# Altium PCB s-radio_PCB.PcbDoc
Units mil, origin at the board's own origin, x right, y up, seen from the top; angles counter-clockwise.
Board outline 1968.5 x 1968.5 mil, 2 copper layers (Top Layer, Bottom Layer), stack 61.811 mil thick; 33 components, 25 nets, 103 pads, 60 vias.
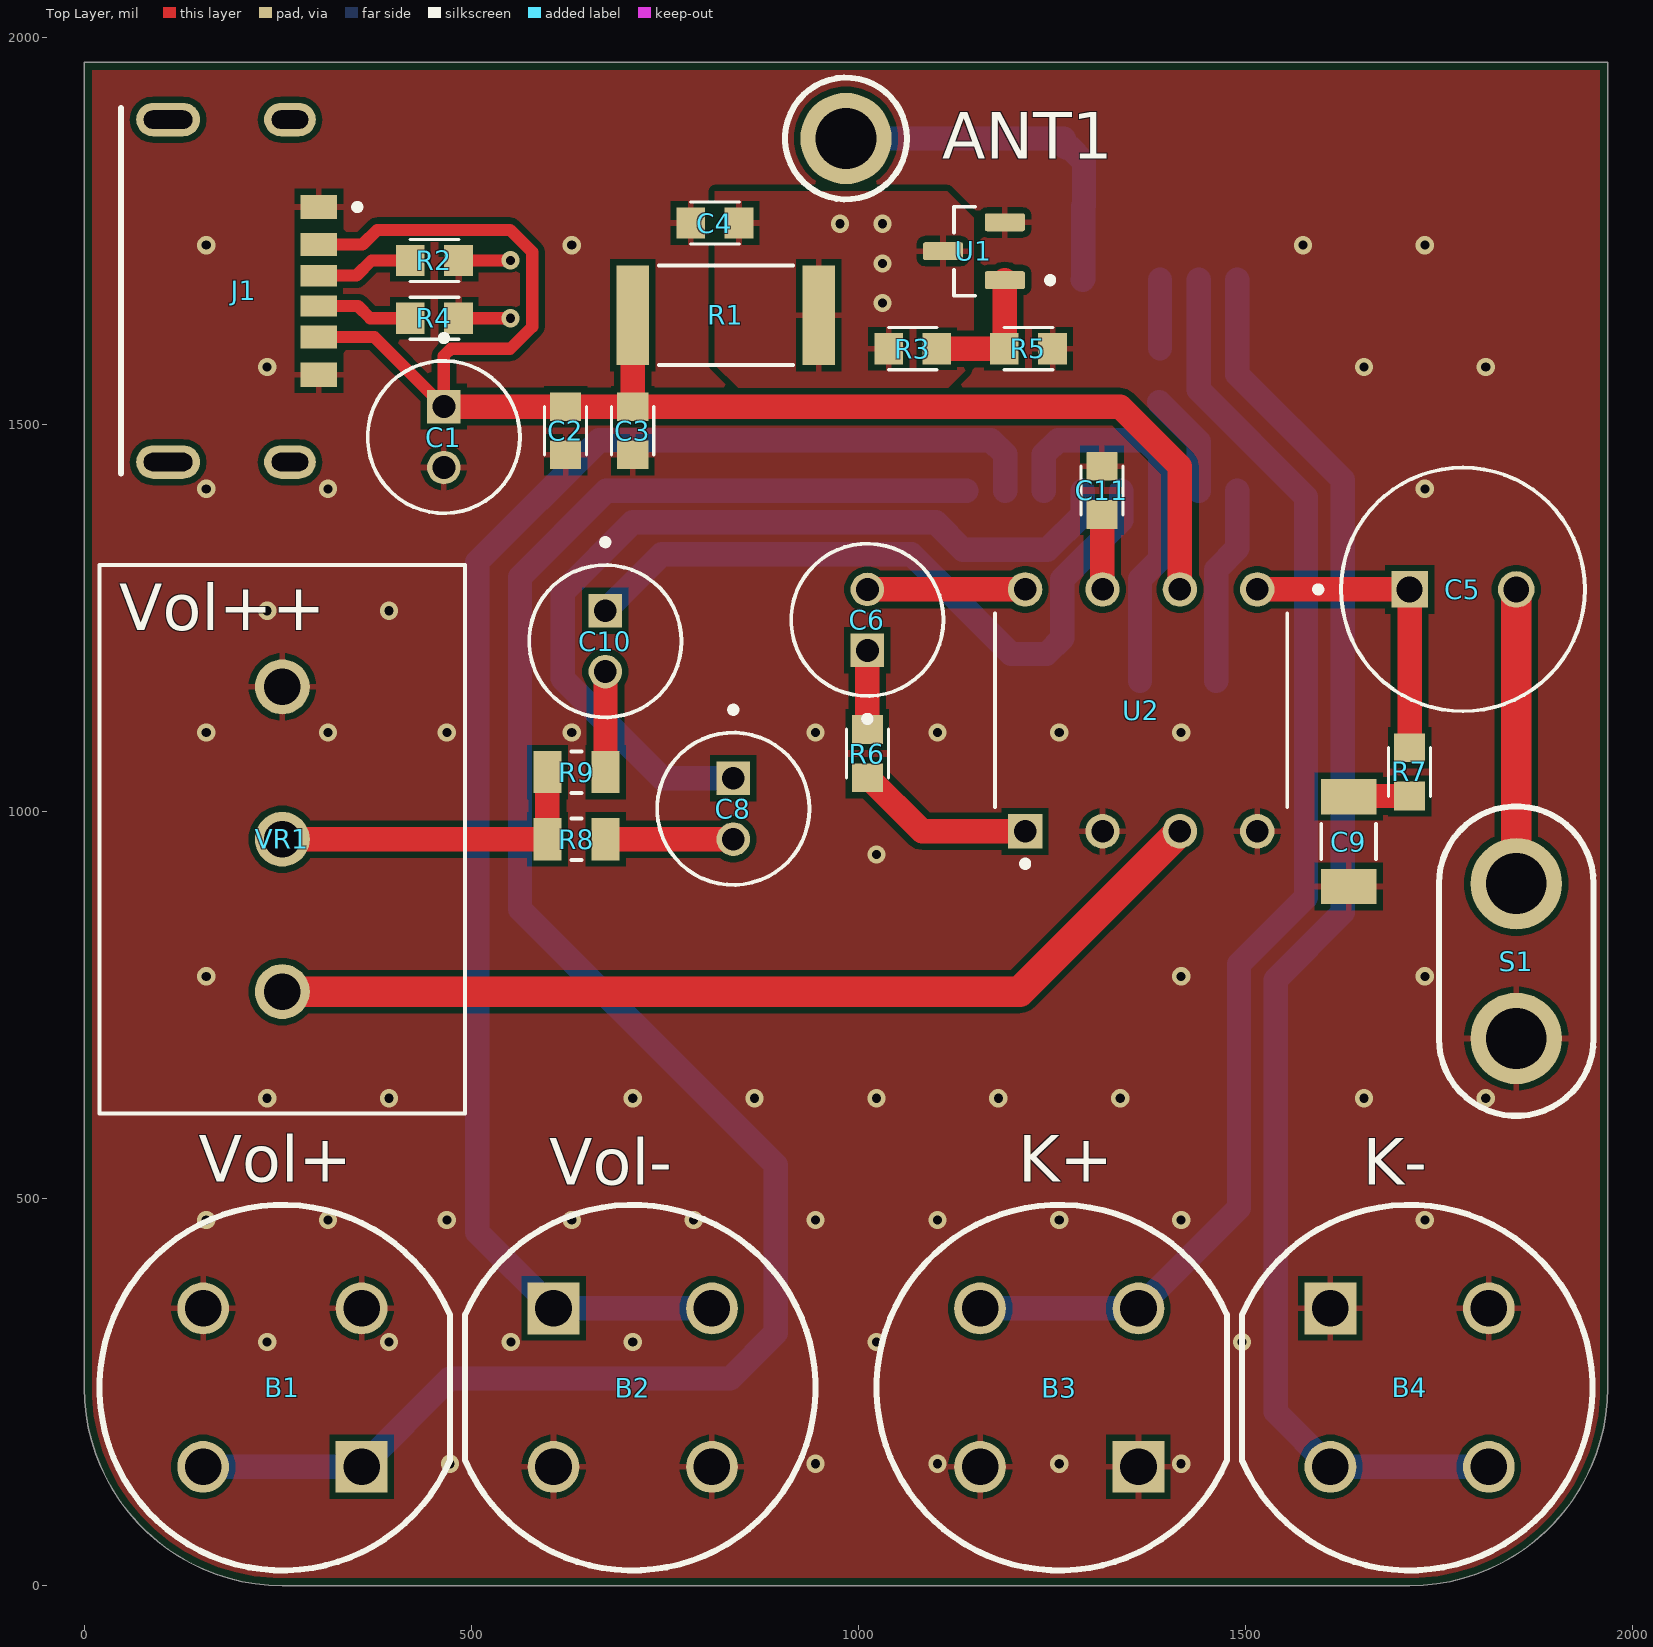
[diagram p0: Top Layer view]
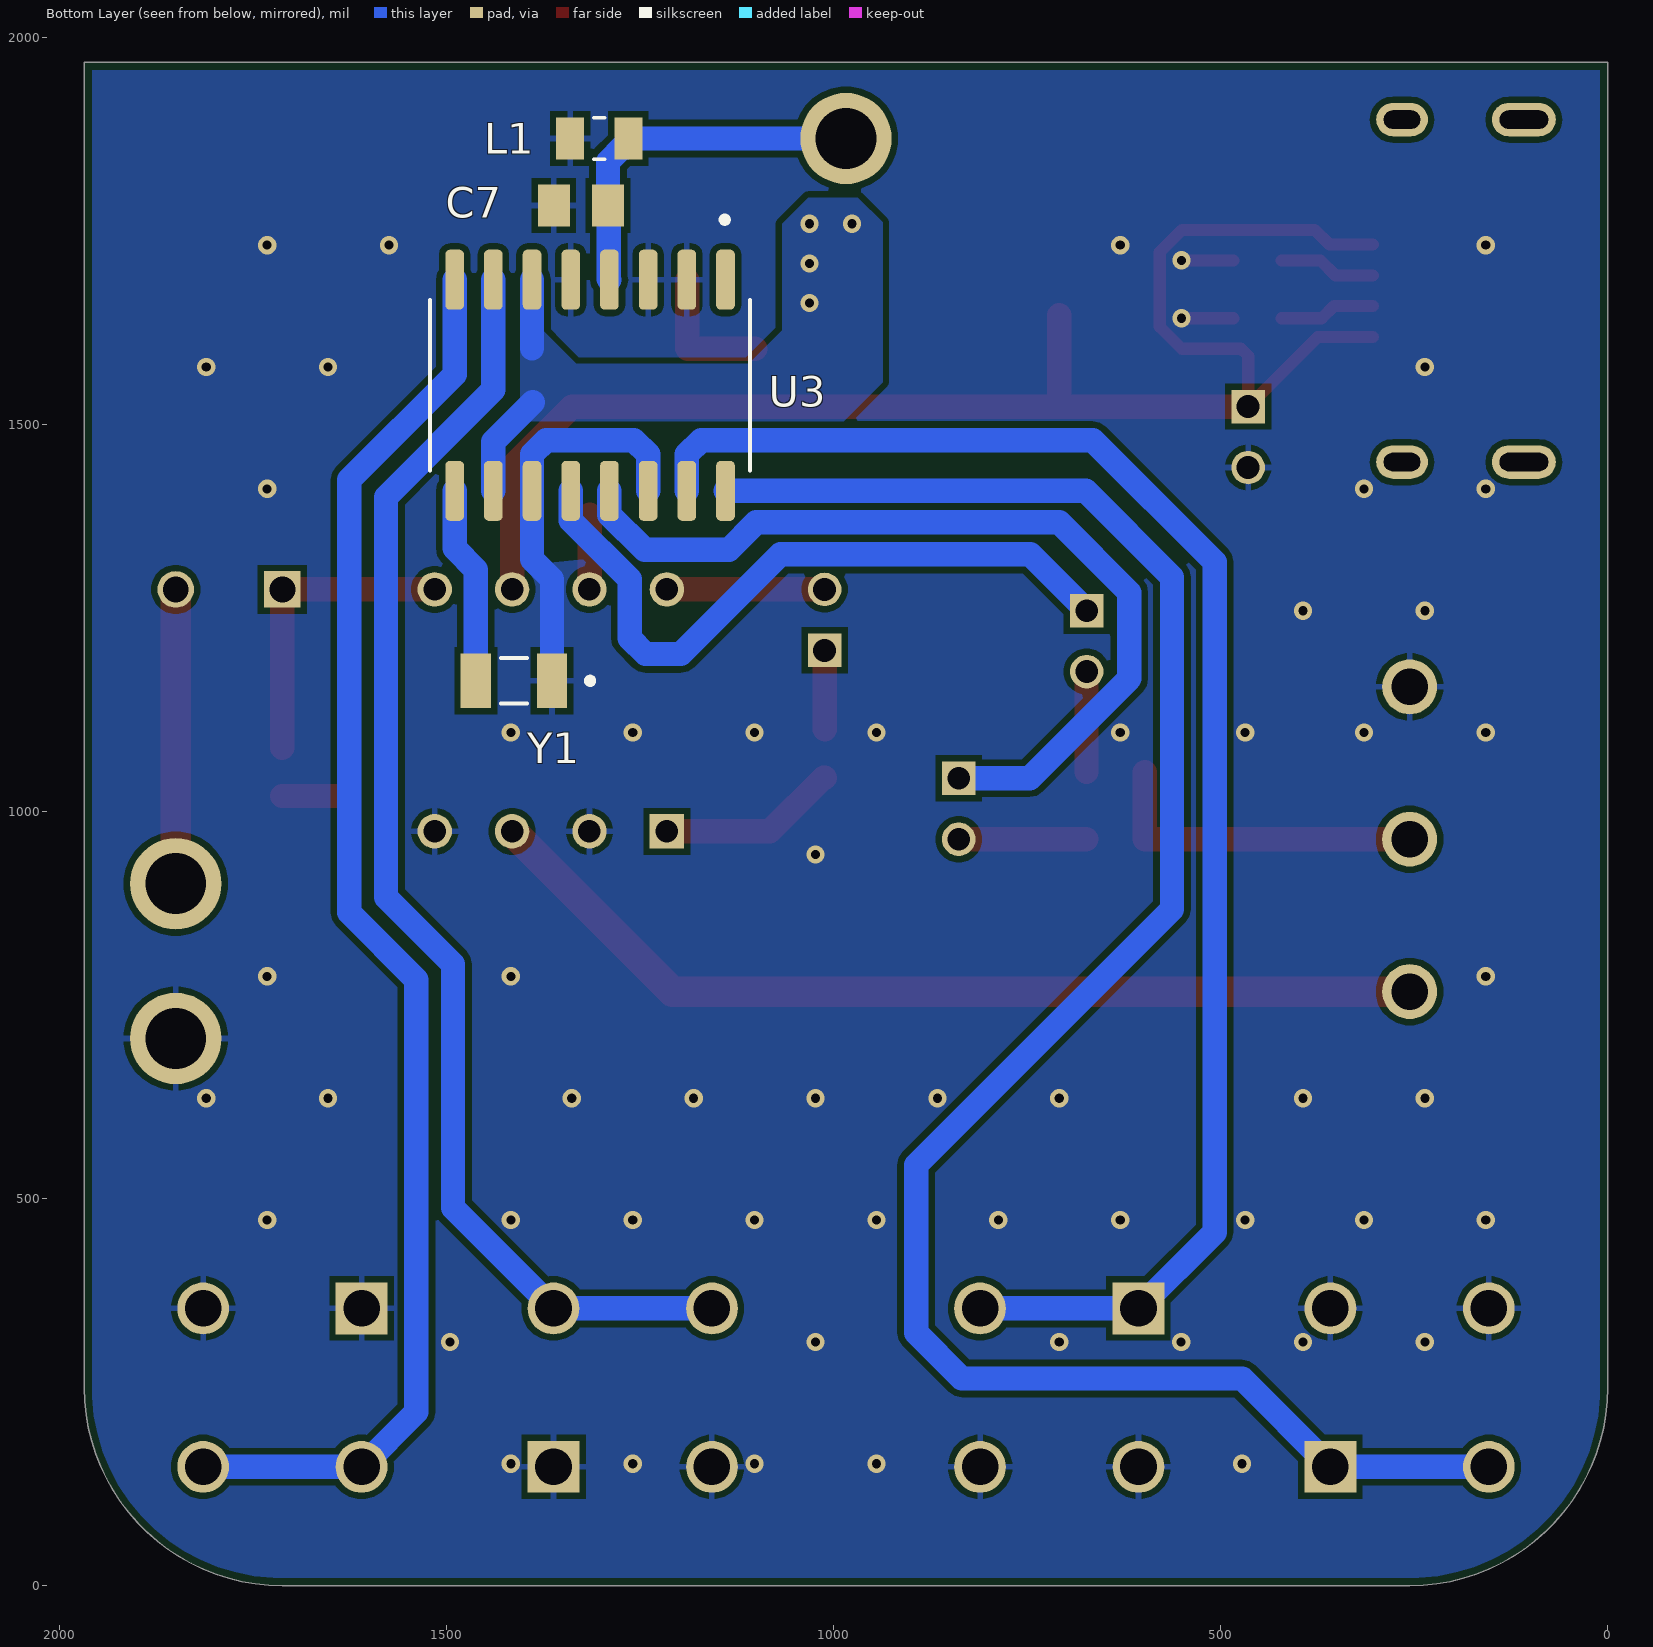
[diagram p1: Bottom Layer view, seen from below]
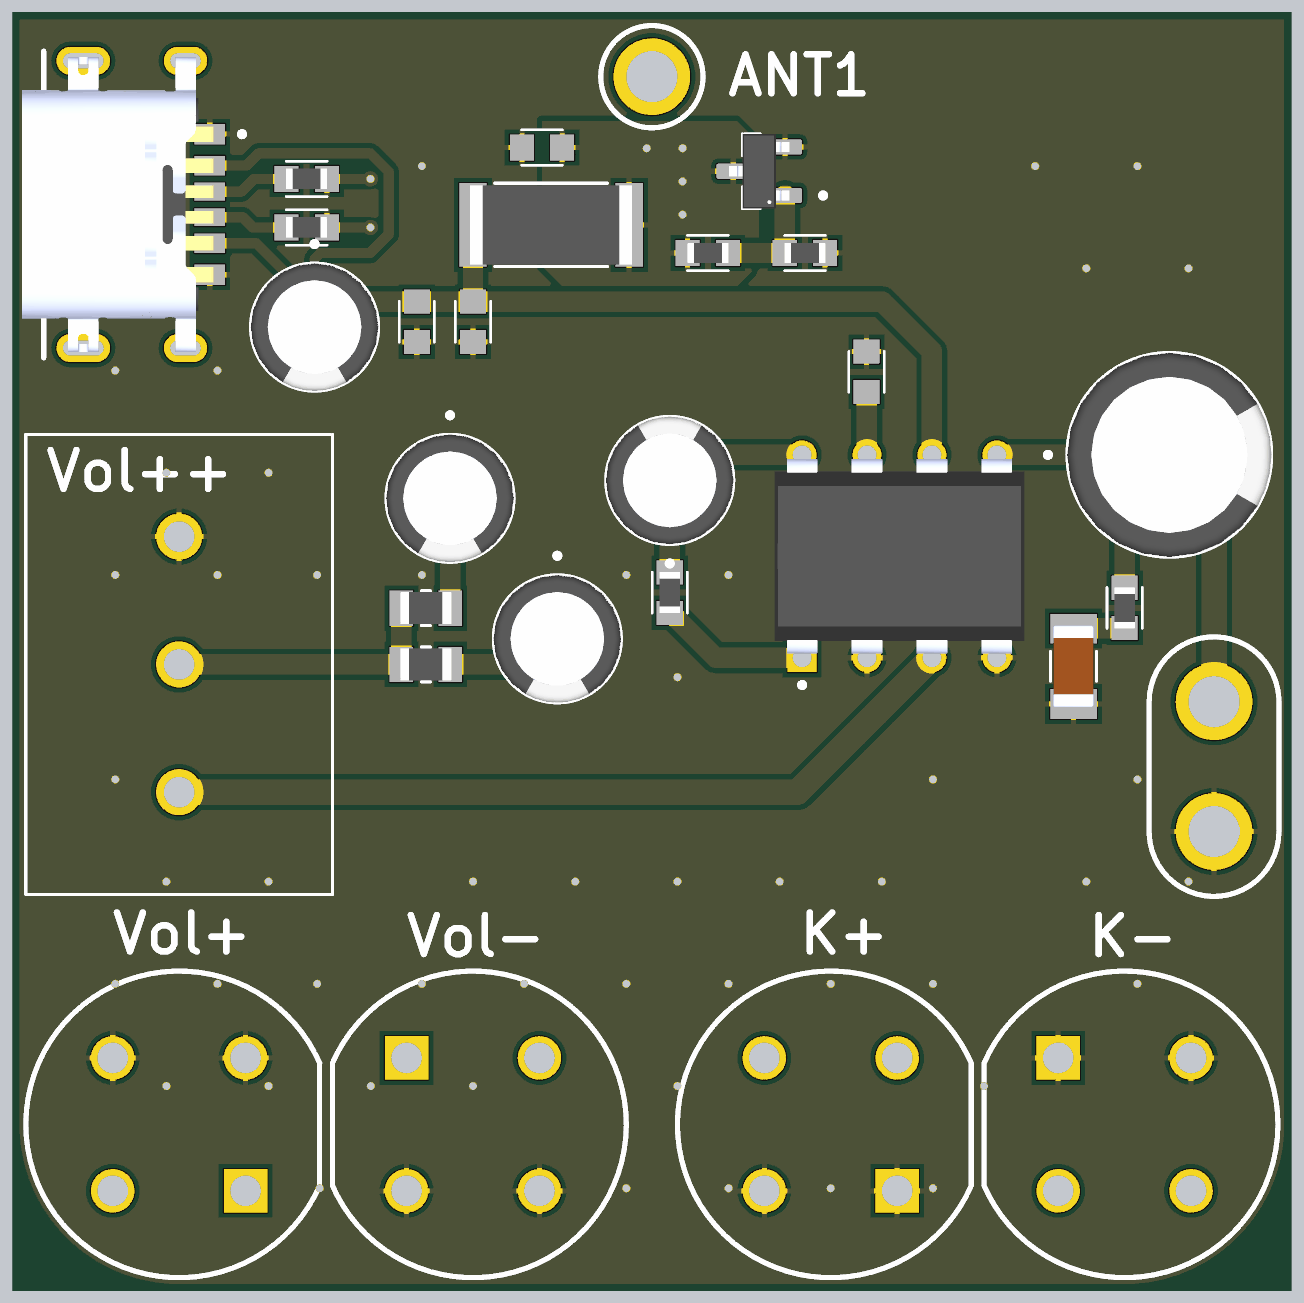
[diagram p2: 3D render of the assembled board from above, using the file's embedded part models]
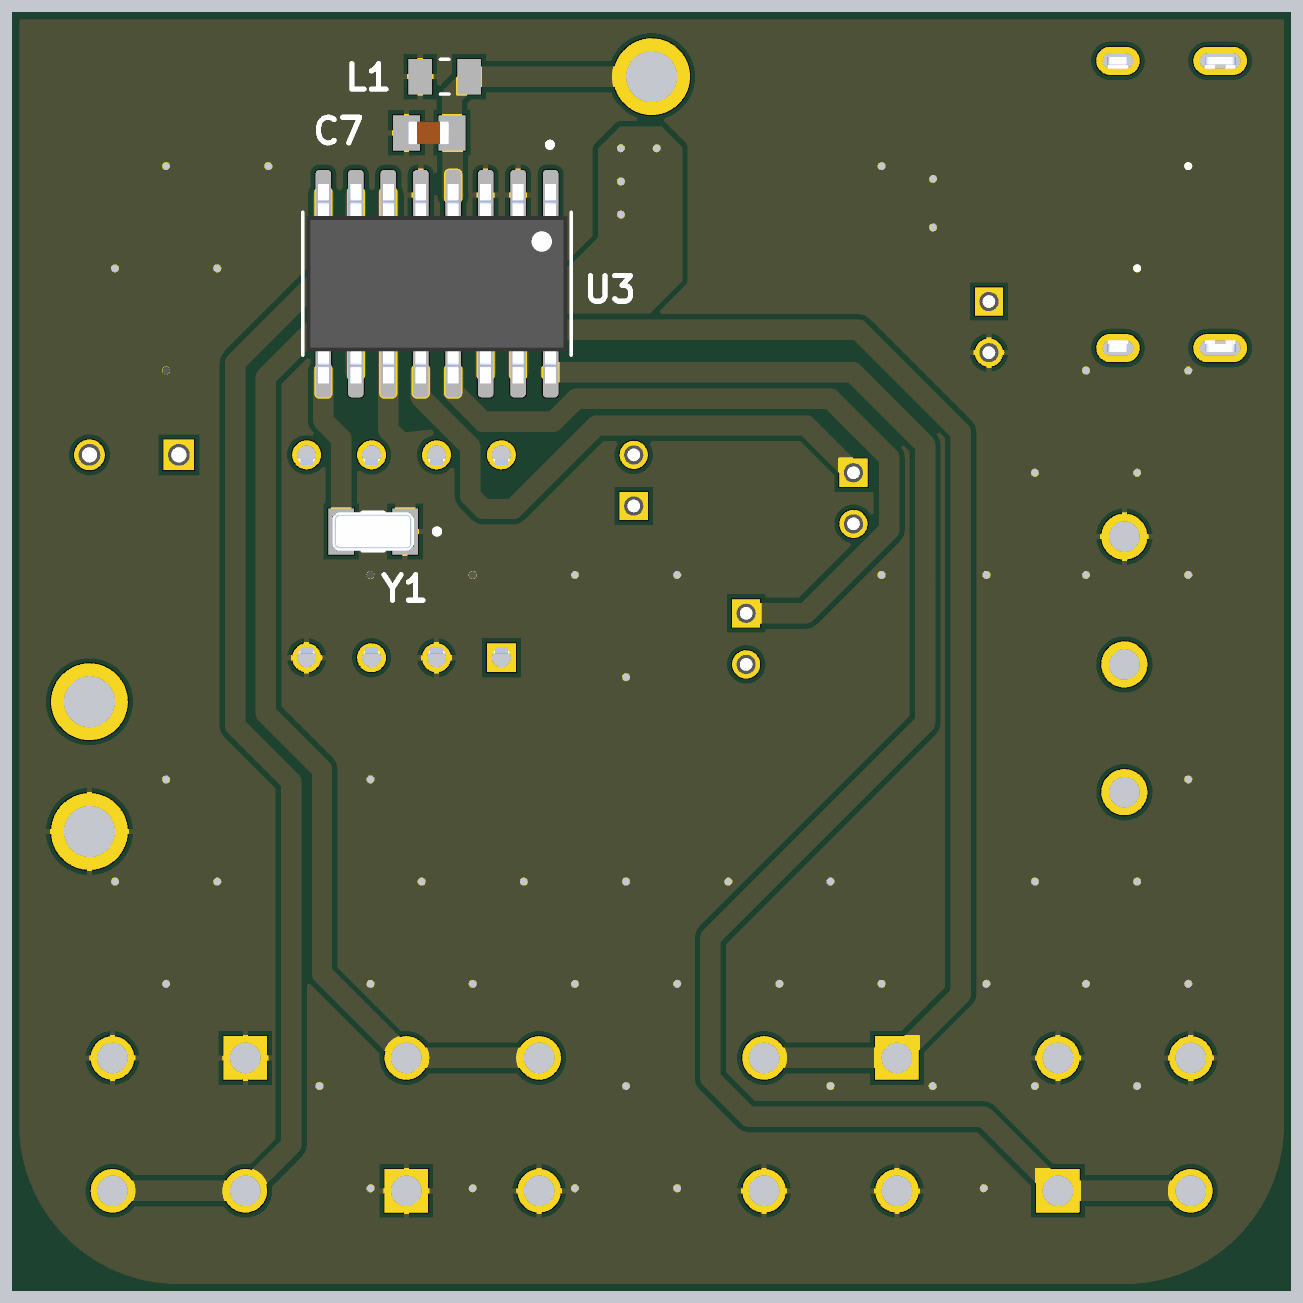
[diagram p3: 3D render of the assembled board from below, using the file's embedded part models]

## Layer stack, top to bottom
Top Solder: solder mask 0.4, Solder Resist, Dk 3.5
Top Layer: signal copper 1.378
Dielectric 1: core 59.0551, FR4 HiTg170, Dk 4.7
Bottom Layer: signal copper 1.378
Bottom Solder: solder mask 0.4, Solder Resist, Dk 3.5

## Board outline
0,1251.97 0,870.08 0,255.91 ccw(c255.91,255.91) 255.91,0 1712.6,0 ccw(c1712.6,255.91) 1968.5,255.91 1968.5,1968.5 0,1968.5

## Design rules (kind name [scope] priority, off if disabled: settings)
AcuteAngle [All] p1: minimum=3.50000000000000E+0001 checktracksonly=FALSE
BoardOutlineClearance "BoardOutlineClearance 1" [All] p1: gap=9.84 ignorepadtopadclearanceinfootprint=FALSE except(0: Arc-SplitContinuation Track-SplitContinuation SMDPad-SplitContinuation THPad-SplitContinuation Via-SplitContinuation Fill-SplitContinuation Poly-SplitContinuation Region-SplitContinuation Text-SplitContinuation) // Milling
BoardOutlineClearance "BoardOutlineClearance 2" [All] p2 off: gap=15.75 ignorepadtopadclearanceinfootprint=FALSE except(0: Arc-SplitContinuation Track-SplitContinuation SMDPad-SplitContinuation THPad-SplitContinuation Via-SplitContinuation Fill-SplitContinuation Poly-SplitContinuation Region-SplitContinuation Text-SplitContinuation) // V-Cut
Clearance "Clearance 3 Oz" [All] p1 off: gap=13.78 ignorepadtopadclearanceinfootprint=FALSE except(9.84: Arc-Hole Track-Hole SMDPad-Hole THPad-Hole Via-Hole Fill-Hole Poly-Hole Region-Hole Text-Hole)
Clearance "Clearance 2 Oz" [All] p2 off: gap=11.81 ignorepadtopadclearanceinfootprint=FALSE except(9.84: Arc-Hole Track-Hole SMDPad-Hole THPad-Hole Via-Hole Fill-Hole Poly-Hole Region-Hole Text-Hole)
Clearance "Clearance-1 1 Oz" [All] p3: gap=7.87 ignorepadtopadclearanceinfootprint=FALSE except(9.84: Arc-Hole Track-Hole SMDPad-Hole THPad-Hole Via-Hole Fill-Hole Poly-Hole Region-Hole Text-Hole) // Standart
Clearance "Clearance-2 1 Oz" [All] p4 off: gap=5.91 ignorepadtopadclearanceinfootprint=FALSE except(7.87: Arc-Fill Arc-Poly Track-Fill Track-Poly SMDPad-Fill SMDPad-Poly THPad-Fill THPad-Poly Via-Fill Via-Poly Fill-Fill Fill-Poly Poly-Poly; 9.84: Arc-Hole Track-Hole SMDPad-Hole THPad-Hole Via-Hole Fill-Hole Poly-Hole Region-Hole Text-Hole) // Advance
Clearance "Clearance-1 1/2 Oz" [All] p5 off: gap=4.92 ignorepadtopadclearanceinfootprint=FALSE except(7.87: Arc-Fill Arc-Poly Track-Fill Track-Poly SMDPad-SMDPad SMDPad-Fill SMDPad-Poly THPad-Fill THPad-Poly Via-Fill Via-Poly Fill-Fill Fill-Poly Poly-Poly Poly-Region Poly-Text; 9.84: Arc-Hole Track-Hole SMDPad-Hole THPad-Hole Via-Hole Fill-Hole Poly-Hole Region-Hole Text-Hole) // Standart
Clearance "Clearance-2 1/2 Oz" [All] p6 off: gap=3.94 ignorepadtopadclearanceinfootprint=FALSE except(5.91: Arc-Fill Arc-Poly Track-Fill Track-Poly SMDPad-SMDPad SMDPad-Fill SMDPad-Poly THPad-Fill THPad-Poly Via-Fill Via-Poly Fill-Fill Fill-Poly Poly-Poly Poly-Region Poly-Text; 9.84: Arc-Hole Track-Hole SMDPad-Hole THPad-Hole Via-Hole Fill-Hole Poly-Hole Region-Hole Text-Hole) // Advance
DiffPairsRouting "DiffPairsRouting 1 Oz" [All] p1: maxlimit=10 minlimit=7.87 mostfreqgap=10 toplayer_minwidth=7.87 toplayer_maxwidth=15 toplayer_prefwidth=15 bottomlayer_minwidth=7.87 bottomlayer_maxwidth=15 bottomlayer_prefwidth=15 maxuncoupledlength=500
DiffPairsRouting "DiffPairsRouting 1/2 Oz" [All] p2 off: maxlimit=10 minlimit=3.94 mostfreqgap=10 toplayer_minwidth=3.94 toplayer_maxwidth=15 toplayer_prefwidth=15 bottomlayer_minwidth=3.94 bottomlayer_maxwidth=15 bottomlayer_prefwidth=15 maxuncoupledlength=500
HoleSize "Minimum HoleSize" [IsPad] p1: absolutevalues=TRUE maxlimit=232.28 minlimit=23.62 maxpercent=80.000 minpercent=20.000
HoleSize "Minimum HoleSize VIA 1" [IsVia] p2: absolutevalues=TRUE maxlimit=232.28 minlimit=11.81 maxpercent=80.000 minpercent=20.000 // Standart
HoleSize "Minimum HoleSize VIA 2" [IsVia] p3 off: absolutevalues=TRUE maxlimit=232.28 minlimit=7.87 maxpercent=80.000 minpercent=20.000 // Advance
HoleToHoleClearance Hole2HoleClearance [All] p1: gap=9.84 allowstackedmicrovias=FALSE
MinimumAnnularRing "Minimum AR VIA Standart" [IsVia] p1: minimumring=5.91
MinimumAnnularRing "Minimum AR PAD Standart" [IsPAD] p2: minimumring=7.87
MinimumAnnularRing "Minimum AR VIA Advance" [IsVia] p3 off: minimumring=3.94
MinimumAnnularRing "Minimum AR PAD Advance" [IsPAD] p4 off: minimumring=5.91
MinimumSolderMaskSliver "SolderMask Bridge Standart" [All] p1: minsoldermaskwidth=5.91 // All Masks
MinimumSolderMaskSliver "SolderMask Bridge Advance" [All] p2: minsoldermaskwidth=3.94 // Mask LDI
PlaneClearance "PlaneClearance 3 Oz" [All] p1 off: clearance=13.78
PlaneClearance "PlaneClearance 2 Oz" [All] p2 off: clearance=11.81
PlaneClearance "PlaneClearance 1 Oz" [All] p3: clearance=7.87
PlaneClearance "PlaneClearance-1 1/2 Oz" [All] p4 off: clearance=7.87 // Standart
PlaneClearance "PlaneClearance-2 1/2 Oz" [All] p5 off: clearance=5.91 // Advance
PlaneConnect "TermalConnect 3 Oz" [All] p1 off: planeconnectstyle=Relief reliefexpansion=7.87 reliefentries=4 reliefconductorwidth=13.78 reliefairgap=13.78 // Standart
PlaneConnect "TermalConnect 2 Oz" [All] p2 off: planeconnectstyle=Relief reliefexpansion=7.87 reliefentries=4 reliefconductorwidth=11.81 reliefairgap=11.81 // Standart
PlaneConnect "TermalConnect-1 1 Oz" [All] p3: planeconnectstyle=Relief reliefexpansion=7.87 reliefentries=4 reliefconductorwidth=7.87 reliefairgap=7.87 // Standart
PlaneConnect "TermalConnect-2 1 Oz" [All] p4 off: pad.planeconnectstyle=Relief pad.reliefexpansion=5.91 pad.reliefentries=4 pad.reliefconductorwidth=7.87 pad.reliefairgap=7.87 via.planeconnectstyle=Direct via.reliefexpansion=5.91 via.reliefentries=4 via.reliefconductorwidth=5.91 via.reliefairgap=5.91 // Advance
PlaneConnect "TermalConnect-1 1/2 Oz" [All] p5 off: planeconnectstyle=Relief reliefexpansion=7.87 reliefentries=4 reliefconductorwidth=7.87 reliefairgap=7.87 // Standart
PlaneConnect "TermalConnect-2 1/2 Oz" [All] p6 off: pad.planeconnectstyle=Relief pad.reliefexpansion=5.91 pad.reliefentries=4 pad.reliefconductorwidth=5.91 pad.reliefairgap=5.91 via.planeconnectstyle=Direct via.reliefexpansion=5.91 via.reliefentries=4 via.reliefconductorwidth=5.91 via.reliefairgap=5.91 // Advance
PolygonConnect "PolygonConnect 3 Oz" [All] p1 off: thpad.connectstyle=Relief thpad.reliefconductorwidth=13.78 thpad.reliefentries=4 thpad.polygonreliefangle="90 Angle" thpad.airgapwidth=13.78 smdpad.connectstyle=Relief smdpad.reliefconductorwidth=13.78 smdpad.reliefentries=4 smdpad.polygonreliefangle="90 Angle" smdpad.airgapwidth=13.78 via.connectstyle=Direct via.reliefconductorwidth=10 via.reliefentries=4 via.polygonreliefangle="90 Angle" via.airgapwidth=10
PolygonConnect "PolygonConnect 2 Oz" [All] p2 off: thpad.connectstyle=Relief thpad.reliefconductorwidth=11.81 thpad.reliefentries=4 thpad.polygonreliefangle="90 Angle" thpad.airgapwidth=11.81 smdpad.connectstyle=Relief smdpad.reliefconductorwidth=11.81 smdpad.reliefentries=4 smdpad.polygonreliefangle="90 Angle" smdpad.airgapwidth=11.81 via.connectstyle=Direct via.reliefconductorwidth=10 via.reliefentries=4 via.polygonreliefangle="90 Angle" via.airgapwidth=10
PolygonConnect "PolygonConnect-1 1 Oz" [All] p3: thpad.connectstyle=Relief thpad.reliefconductorwidth=7.87 thpad.reliefentries=4 thpad.polygonreliefangle="90 Angle" thpad.airgapwidth=7.87 smdpad.connectstyle=Relief smdpad.reliefconductorwidth=7.87 smdpad.reliefentries=4 smdpad.polygonreliefangle="90 Angle" smdpad.airgapwidth=7.87 via.connectstyle=Direct via.reliefconductorwidth=10 via.reliefentries=4 via.polygonreliefangle="90 Angle" via.airgapwidth=10 // Standart
PolygonConnect "PolygonConnect-2 1 Oz" [All] p4 off: thpad.connectstyle=Relief thpad.reliefconductorwidth=5.91 thpad.reliefentries=4 thpad.polygonreliefangle="90 Angle" thpad.airgapwidth=5.91 smdpad.connectstyle=Relief smdpad.reliefconductorwidth=5.91 smdpad.reliefentries=4 smdpad.polygonreliefangle="90 Angle" smdpad.airgapwidth=5.91 via.connectstyle=Direct via.reliefconductorwidth=10 via.reliefentries=4 via.polygonreliefangle="90 Angle" via.airgapwidth=10 // Advance
PolygonConnect "PolygonConnect-1 1/2 Oz" [All] p5 off: thpad.connectstyle=Relief thpad.reliefconductorwidth=5.91 thpad.reliefentries=4 thpad.polygonreliefangle="90 Angle" thpad.airgapwidth=7.87 smdpad.connectstyle=Relief smdpad.reliefconductorwidth=7.87 smdpad.reliefentries=4 smdpad.polygonreliefangle="90 Angle" smdpad.airgapwidth=7.87 via.connectstyle=Direct via.reliefconductorwidth=10 via.reliefentries=4 via.polygonreliefangle="90 Angle" via.airgapwidth=10 // Standart
PolygonConnect "PolygonConnect-2 1/2 Oz" [All] p6 off: thpad.connectstyle=Relief thpad.reliefconductorwidth=4.92 thpad.reliefentries=4 thpad.polygonreliefangle="90 Angle" thpad.airgapwidth=5.91 smdpad.connectstyle=Relief smdpad.reliefconductorwidth=4.92 smdpad.reliefentries=4 smdpad.polygonreliefangle="90 Angle" smdpad.airgapwidth=5.91 via.connectstyle=Direct via.reliefconductorwidth=10 via.reliefentries=4 via.polygonreliefangle="90 Angle" via.airgapwidth=10 // Advance
RoutingCorners [All] p1 off: cornerstyle=45-Degree minsetback=100 maxsetback=100
RoutingVias [All] p1: holewidth=11.81 width=23.62 viastyle="Through Hole" minholewidth=7.87 minwidth=15.75 maxholewidth=232.28 maxwidth=251.97
SilkToSilkClearance Silk2SilkClearance [All] p1 off: silktosilkclearance=5.91
SilkToSolderMaskClearance Silk2SolderMaskClearance [IsPad] p1 off: minsilkscreentomaskgap=5.91 clearancetoexposedcopper=TRUE
SolderMaskExpansion SolderMaskExpansion-1 [All] p1: expansion=1.97 istentingtop=FALSE // Standart
SolderMaskExpansion "SolderMaskExpansion LDI" [All] p2: expansion=0.98 istentingtop=FALSE // Advance
UnRoutedNet [All] p1: checkbadconnections=TRUE
Width "Width 3 Oz" [All] p1 off: maxlimit=393.7 minlimit=13.78 preferedwidth=15.75 checkconnectedcopper=TRUE
Width "Width 2 Oz" [All] p2 off: maxlimit=393.7 minlimit=11.81 preferedwidth=13.78 minimp=50.000000 maximp=50.000000 favimp=50.000000 checkconnectedcopper=TRUE
Width "Width 1 Oz" [All] p3: maxlimit=393.7 minlimit=5.91 preferedwidth=7.87 checkconnectedcopper=TRUE
Width "Width 1/2 Oz" [All] p4 off: maxlimit=393.7 minlimit=3.94 preferedwidth=4.92 checkconnectedcopper=TRUE
20 further rules are at their usual default settings.

## Components (designator, comment, footprint, x,y, rotation, side; value= is the part's Value field where it differs from the comment)
ANT1 "Antenna" ANTENNA 984.25,1870.08 r0 top
B1 "TS4-1BN" TS4-1BN 255.91,255.91 r180 top
B2 "TS4-1BN" TS4-1BN 708.66,255.91 r0 top
B3 "TS4-1BN" TS4-1BN 1259.84,255.91 r180 top
B4 "TS4-1BN" TS4-1BN 1712.6,255.91 r0 top
C1 "К50-35" "К50-35 5X7" 464.57,1484.25 r270 top value="10 uF"
C2 "CAP 0603 1 uF" CAP_0603 622.05,1492.52 r90 top value="1 uF"
C3 "CAP 0603 0.1 uF" CAP_0603 708.66,1492.52 r90 top value="0.1 uF"
C4 "CAP 0603 0.1 uF" CAP_0603 814.96,1760.83 r0 top value="0.1 uF"
C5 "CAP 270 uF" CAPPRD350W60D800H1500 1781.5,1287.4 r0 top value="270 uF"
C6 "К50-35" "К50-35 5X7" 1011.81,1248.03 r90 top value="10 uF"
C7 "CAP 0805 24 pF" CAP_0805 1326.77,1783.46 r180 bottom value="24 pF"
C8 "К50-35" "К50-35 5X7" 838.58,1003.94 r270 top value="10 uF"
C9 "CAP 0.05uF 1206" CAP_1206 1633.86,961.61 r90 top value="0.05 uF"
C10 "К50-35" "К50-35 5X7" 673.23,1220.47 r270 top value="10 uF"
C11 "CAP 0603 0.1 uF" CAP_0603 1314.96,1415.35 r90 top value="0.1 uF"
J1 "USB4515-GF-A_REVA" GCT_USB4515-GF-A_REVA 108.27,1673.23 r270 top
L1 "LQW2BASR10J00L" L_0805 1303.15,1870.08 r180 bottom value="100 nH"
R1 "RES 27 Ohm" RES_2512 828.94,1641.73 r0 top value="27 R"
R2 "RES 5.1 kOhm" RES_0603 452.36,1712.6 r0 top value="5.1 kOhm"
R3 "RES 1 kOhm" RES_0603 1070.47,1598.43 r180 top value="1 kOhm"
R4 "RES 5.1 kOhm" RES_0603 452.36,1637.8 r0 top value="5.1 kOhm"
R5 "RES 3 kOhm" RES_0603 1220.08,1598.43 r180 top value="3 kOhm"
R6 "RES 1.2 kOhm" RES_0603 1011.81,1075.2 r270 top value="1.2 kOhm"
R7 "RES 10 R" RES_0603 1712.6,1051.57 r90 top value="10 R"
R8 "RES 4.7 kOhm" RES_0805 636.02,964.57 r180 top value="4.7 k"
R9 "RES 4.7 kOhm" RES_0805 636.02,1051.18 r180 top value="4.7 k"
S1 "SPEAKER" SPEAKER 1850.39,807.09 r270 top
U1 "TL431" SOT95P237X112-3N 1149.61,1724.41 r180 top
U2 "LM386" DIP-8 1365.75,1131.1 r90 top
U3 "RDA5807" SOP-16 1314.96,1551.18 r270 bottom
VR1 "VAR REZ 10 kOhm" P160 255.91,964.57 r270 top value="10 kOhm"
Y1 "NX3215SA-32.768K-STD-MUA-8" XTAL_NX3215SA-32.768K-STD-MUA-8 1413.39,1169.29 r0 bottom value="32768 Hz"

## Footprints (in the part's own frame and the unit in brackets; to place one, negate y for a bottom-side part, rotate by r counter-clockwise, add the part's x,y. Pads: shape width x height; smd on the part's side, far side on the other; paste and mask are expansions set on the pad)
ANTENNA [mm]
  round 3 hole 2: 1(0,0)
  silkscreen extent -2,-2 2,2
CAP_0603 [mm]
  rect 0.94x1.02 smd: 1(-0.79,0) 2(0.79,0)
  silkscreen extent -0.8,-0.69 0.8,0.69
CAP_0805 [mm]
  rect 1.05x1.38 smd: 1(-0.888,0) 2(0.888,0)
  body extent -0.83,-0.45 0.77,0.45, height 0.8
CAP_1206 [mm]
  rect 1.16x1.82 smd: 1(-1.475,0) 2(1.475,0)
  silkscreen extent -0.57,-0.9 0.57,0.9, body extent -1.6,-0.8 1.6,0.8, height 0.94
CAPPRD350W60D800H1500 [mm]
  round 1.2 hole 0.85: N(1.75,0)
  rect 1.2x1.2 hole 0.85: P(-1.75,0)
  silkscreen extent -4.85,-4 4,4, body extent -4,-4 4,4, height 15
DIP-8 [mm]
  rect 1.13x1.13 hole 0.74: 1(-3.97,3.81)
  round 1.13 hole 0.74: 2(-3.97,1.27) 3(-3.97,-1.27) 4(-3.97,-3.81) 5(3.97,-3.81) 6(3.97,-1.27) 7(3.97,1.27) 8(3.97,3.81)
  silkscreen extent -5.13,-4.79 3.18,4.79, body extent -3.81,-4.88 3.81,4.88, height 4.96
GCT_USB4515-GF-A_REVA [mm]
  rect 0.7x1.2 smd: A5(-0.5,4.95) B5(0.5,4.95)
  rect 0.76x1.2 smd: A9(1.52,4.95) B9(-1.52,4.95)
  rect 0.8x1.2 smd: A12(2.75,4.95) B12(-2.75,4.95)
  oval 1.1x2.1 hole 0.6 slot 1.6 at 90 deg: S1(-5.62,0) S2(5.62,0)
  oval 1.1x1.7 hole 0.6 slot 1.2 at 90 deg: S3(-5.62,4) S4(5.62,4)
  silkscreen extent -6,-1.55 6,6.31, body extent -5.77,-2.4 5.77,5.1, height 1.56
L_0805 [mm]
  rect 0.92x1.38 smd: 1(-0.955,0) 2(0.955,0)
  silkscreen extent -0.17,-0.68 0.17,0.68
P160 [mm]
  round 1.8 hole 1.2: 1(-5,0) 2(0,0) 3(5,0)
  silkscreen extent -9,-6 9,6
RES_0603 [mm]
  rect 0.94x1.02 smd: 1(-0.79,0) 2(0.79,0)
  silkscreen extent -0.8,-0.69 0.8,0.69, body extent -0.8,-0.4 0.8,0.4, height 0.55
RES_0805 [mm]
  rect 0.92x1.38 smd: 1(-0.955,0) 2(0.955,0)
  silkscreen extent -0.17,-0.68 0.17,0.68, body extent -1,-0.63 1,0.63, height 0.6
RES_2512 [mm]
  rect 1.07x3.27 smd: 1(-3.055,0) 2(3.055,0)
  silkscreen extent -2.2,-1.63 2.2,1.63, body extent -3.17,-1.55 3.17,1.55, height 0.65
SOP-16 [mm]
  rrect50% 1.97x0.61 smd: 1(-3.465,4.445) 2(-3.465,3.175) 3(-3.465,1.905) 4(-3.465,0.635) 5(-3.465,-0.635) 6(-3.465,-1.906) 7(-3.465,-3.175) 8(-3.465,-4.445) 9(3.465,-4.445) 10(3.465,-3.175) 11(3.465,-1.905) 12(3.465,-0.635) 13(3.465,0.635) 14(3.465,1.905) 15(3.465,3.175) 16(3.465,4.445)
  silkscreen extent -5.53,-5.25 2.8,5.25, body extent -3.9,-5.1 3.9,5.1, height 2
SOT95P237X112-3N [mm]
  rrect25% 1.32x0.59 smd: 1(-1.015,0.95) 2(-1.015,-0.95) 3(1.015,0)
  silkscreen extent -2.6,-1.46 0.65,1.46, body extent -1.18,-1.46 1.18,1.46, height 1.12
SPEAKER [mm]
  round 3 hole 2: 1(-2.54,0) 2(2.54,0)
  silkscreen extent -5.08,-2.54 5.08,2.54
TS4-1BN [mm]
  rect 1.7x1.7 hole 1.2: 1(-2.6,2.6)
  round 1.7 hole 1.2: 2(2.6,2.6) 3(-2.6,-2.6) 4(2.6,-2.6)
  silkscreen extent -5.5,-6 6,6
XTAL_NX3215SA-32.768K-STD-MUA-8 [mm]
  rect 1x1.8 smd: 1(-1.25,0) 2(1.25,0)
  silkscreen extent -2.6,-0.75 0.43,0.75, body extent -1.6,-0.75 1.6,0.75, height 0.9
"К50-35 5X7" [mm]
  round 1.1 hole 0.75: N(1,0)
  rect 1.1x1.1 hole 0.75: P(-1,0)
  silkscreen extent -3.35,-2.5 2.5,2.5, body extent -2.5,-2.5 2.5,2.5, height 11

## Part data
C1 C6 C8 C10: "10 uF 50V Aluminum Electrolytic Capacitors Radial", Voltage="50 V", Availability="In Stock", MP=К50-35
C2 C3 C4 C11: Package=0603, Availability=Unavailable, Price=None
  C3 C4 C11: Link=https://www.chipdip.ru/product0/226236018
C5: "270ÂµF 35V Aluminum Electrolytic Capacitors Radial, Can 8000 Hrs @ 105Â°C", Package="RADIAL-2 Panasonic", Check_prices=https://www.snapeda.com/parts/EEUFR1V271L/Panasonic/view-part/5793680/?ref=eda, Digi-Key_Part_Number=P15388CT-ND, MF=Panasonic, MP=EEUFR1V271L, SnapEDA_Link=https://www.snapeda.com/parts/EEUFR1V271L/Panasonic/view-part/5793680/?ref=snap
C7: Package=0805, Availability=Unavailable, Link=https://www.chipdip.ru/product/grm2165c1h240j, MP=GRM2165C1H240J, Price=None
C9: "Ceramic Capacitor 0.05uf, 50v, X7r, 5%, 1206, Full Reel", Package=1206, Check_prices=https://www.snapeda.com/parts/12065C503JAT2A/AVX/view-part/2779742/?ref=eda, ComponentLink1Description="New link", Digi-Key_Part_Number=478-12065C503JAT2ACT-ND, Link=https://www.chipdip.ru/product0/9001260404, MF=AVX, MP=12065C503JAT2A, Purchase-URL=https://pricing.snapeda.com/search/part/12065C503JAT2A/?ref=eda, SnapEDA_Link=https://www.snapeda.com/parts/12065C503JAT2A/AVX/view-part/2779742/?ref=snap
J1: "Type C USB Charging Connector", Package=None, Check_prices=https://www.snapeda.com/parts/USB4515-GF-A/Global+Connector+Technology/view-part/?ref=eda, Digi-Key_Part_Number=2073-USB4515-GF-ATR-ND, MF="Global Connector Technology", MP=USB4515-GF-A, SnapEDA_Link=https://www.snapeda.com/parts/USB4515-GF-A/Global+Connector+Technology/view-part/?ref=snap
L1: "Ind RF Chip Wirewound 100nH 5% 150MHz 65Q-Factor 400mA 0805 Embossed T/R", Package=None, Availability=Unavailable, Link=https://www.chipdip.ru/product/lqw2basr10j00l, MP=LQW2BASR10J00L, Price=None
R1: "27 Ohm", Package=0805, Tolerance=1%, Availability=Unavailable, Link=https://www.chipdip.ru/product/0.125w-0805-4.7-kom-1, MF="{'manufacturer': u'Yageo'}", MP="0.125Вт 0805 4.7 кОм", Price=None
R2 R4: "5.1 kOhm", Package=0603, Tolerance=5%, Availability=Unavailable, Link=https://www.chipdip.ru/product/0603-5-5k1, MF="{'manufacturer': u'Yageo'}", MP="0.1Вт 0603 5.1 кОм", Price=None
R3: "1 kOhm", Package=0805, Tolerance=5%, Availability=Unavailable, Link=https://www.chipdip.ru/product/0.1w-0603-1-kom-5, MF="{'manufacturer': u'Yageo'}", MP="0.1Вт 0603 1 кОм", Price=None
R5: "3 kOhm", Package=0603, Tolerance=1%, Availability=Unavailable, Link=https://www.chipdip.ru/product/0.1w-0603-3-kom-1, MF="{'manufacturer': u'Yageo'}", MP="0.1Вт 0603 3 кОм", Price=None
R6: "1.2 kOhm", Package=0603, Tolerance=5%, Availability=Unavailable, MF="{'manufacturer': u'Yageo'}", MP="0.1Вт 0603 1.2 кОм", Price=None
R7: "10 Ohm", Package=0603, Tolerance="1 %", Availability=Unavailable, Link=https://www.chipdip.ru/product0/8007036517, MF="{'manufacturer': u'Yageo'}", MP="0.1Вт 0603 10 Ом", Price=None
R8 R9: "4.7 kOhm", Package=0805, Tolerance=1%, Availability=Unavailable, Link=https://www.chipdip.ru/product/0.125w-0805-4.7-kom-1, MF="{'manufacturer': u'Yageo'}", MP="0.125Вт 0805 4.7 кОм", Price=None
U1: "Ic, Tl431ilp, Tl431, Tl431a, Tl4 31b, Tl432, Tl432a, Tl432b<Nv", Package=SOT-23, Availability=Unavailable, MP=TL431, Price=None
U2: Package=None, Availability=Unavailable, MP=LM386N-3/NOPB, Price=None
Y1: "32.768 kHz Â±20ppm Crystal 12.5pF 70 kOhms 2-SMD, No Lead", Package="SMD-2 NDK", Availability="In Stock", Check_prices=https://www.snapeda.com/parts/NX3215SA-32.768K-STD-MUA-8/NDK+America%252C+Inc./view-part/?ref=eda, ComponentLink1Description="New link", Link=https://www.chipdip.ru/product0/9000523964, MF="NDK America,", MP=NX3215SA-32.768K-STD-MUA-8, Price=None, Purchase-URL=https://pricing.snapeda.com/search/part/NX3215SA-32.768K-STD-MUA-8/?ref=eda, SnapEDA_Link=https://www.snapeda.com/parts/NX3215SA-32.768K-STD-MUA-8/NDK+America%252C+Inc./view-part/?ref=snap
U3: PM=RDA5807
VR1: Availability=Unavailable, MF="{'manufacturer': u'Yageo'}", MP="VAR REZ 10 kOhm", Price=None

## Via types
v1: diameter 23.62, hole 11.81, Top Layer to Bottom Layer, tented both sides, 60 vias

## Nets (pads, with @x,y where several pads share a name; then routed paths per layer and width w, separated by ;. In a path a pad name is that pad's centre, name@x,y a point inside that pad or via, vN(x,y) a via of type N, cw(c..) or ccw(c..) an arc to the next point about the centre after c; other vN are vias at no path point)
3V3: C4.2 R1.2 R3.2 U1.3 U3.6 U3.10 | length 223.7
  Bottom Layer w31.5: 1389.27,1529.04 1439.96,1478.35 U3.10 ; 1389.98,1599.19 U3.6
  other v1: 1031.5,1657.48 1031.5,1708.66 976.38,1759.84 1031.5,1759.84
5V: C1.P C2.2 C3.2 J1.A9 J1.B9 R1.1 U2.6 | length 2046.1
  Top Layer w15.75: J1.A9 374.8,1613.39 C1.P 464.57,1589.2 473.79,1598.43 550.26,1598.43 578.74,1626.91 578.74,1723.48 550.26,1751.97 378.49,1751.97 359.59,1733.07 J1.B9
  Top Layer w31.5: C1.P C2.2 C3.2 ; R1.1 C3.2 ; U2.6 1415.75,1446.46 1338.58,1523.62 C3.2
GND: B1.3 B1.4 B2.3 B2.4 B3.1 B3.2 B4.1 B4.2 C1.N C2.1 C3.1 C4.1 C7.1 C9.1 C11.2 J1.A12 J1.B12 L1.1 R2.2 R4.2 R5.1 S1.2 U1.2 U2.2 U2.4 U3.2 U3.3 U3.5 U3.11 U3.14 VR1.1 Y1.1 | length 650
  Top Layer w15.75: R4.2 v1(550.65,1637.8) ; R2.2 v1(550.65,1712.6)
  Bottom Layer w31.5: U3.14 1239.96,1461.87 1258.41,1480.32 1371.51,1480.32 1389.96,1461.87 1389.96,1326.48 1364.17,1300.69 Y1.1
  other v1: 472.44,157.48 944.88,157.48 1102.36,157.48 1259.84,157.48 1417.32,157.48 236.22,314.96 393.7,314.96 551.18,314.96 708.66,314.96 1023.62,314.96 1496.06,314.96 157.48,472.44 314.96,472.44 468.5,472.44 629.92,472.44 787.4,472.44 944.88,472.44 1102.36,472.44 1259.84,472.44 1417.32,472.44 1732.28,472.44 236.22,629.92 393.7,629.92 708.66,629.92 866.14,629.92 1023.62,629.92 1181.1,629.92 1338.58,629.92 1653.54,629.92 1811.02,629.92 157.48,787.4 1417.32,787.4 1732.28,787.4 1023.62,944.88 157.48,1102.36 314.96,1102.36 468.5,1102.36 629.92,1102.36 944.88,1102.36 1102.36,1102.36 1259.84,1102.36 1417.32,1102.36 236.22,1259.84 393.7,1259.84 157.48,1417.32 314.96,1417.32 1732.28,1417.32 236.22,1574.8 1653.54,1574.8 1811.02,1574.8 157.48,1732.28 629.92,1732.28 1574.8,1732.28 1732.28,1732.28
NetANT1_1: ANT1.1 C7.2 L1.2 U3.4 | length 478.6
  Bottom Layer w31.5: ANT1.1 L1.2 1265.55,1861.02 1267.91,1858.66 1273.36,1858.66 1291.81,1840.21 C7.2 1290.89,1782.54 1290.89,1688.52 U3.4
NetB1_1: B1.1 B1.2 U3.16 | length 2548.5
  Bottom Layer w31.5: B1.2 B1.1 472.44,267.72 834.65,267.72 893.7,326.77 893.7,543.59 562.99,874.3 562.99,1303.15 674.61,1414.76 U3.16
NetB2_1: B2.1 B2.2 U3.15 | length 2012.1
  Bottom Layer w31.5: B2.2 B2.1 507.87,456.69 507.87,1322.83 665.35,1480.32 1171.51,1480.32 1189.96,1461.87 U3.15
NetB3_3: B3.3 B3.4 U3.7 | length 1681.2
  Bottom Layer w31.5: B3.4 B3.3 1492.13,488.19 1492.13,803.15 1578.74,889.76 1578.74,1406.66 1439.96,1545.44 U3.7
NetB4_3: B4.3 B4.4 U3.8 | length 1860.4
  Bottom Layer w31.5: U3.8 1489.96,1565.16 1625.98,1429.13 1625.98,869.82 1539.37,783.21 1539.37,224.41 B4.3 B4.4
NetC5_N: C5.N S1.1 | length 380.3
  Top Layer w39.37: S1.1 C5.N
NetC5_P: C5.P R7.2 U2.5 | length 401.6
  Top Layer w31.5: U2.5 C5.P R7.2
NetC6_N: C6.N U2.8 | length 203.9
  Top Layer w31.5: C6.N U2.8
NetC6_P: C6.P R6.1 | length 102.4
  Top Layer w31.5: R6.1 C6.P
NetC8_N: C8.N R8.1 | length 165
  Top Layer w31.5: R8.1 C8.N
NetC8_P: C8.P U3.13 | length 1158.7
  Bottom Layer w31.5: C8.P 746.99,1043.31 618.11,1172.19 618.11,1283.46 708.66,1374.02 1100.03,1374.02 1135.46,1338.58 1244.46,1338.58 1289.96,1384.09 U3.13
NetC9_2: C9.2 R7.1 | length 79.1
  Top Layer w15: C9.2 C9.2@1634.65,1020.47
  Top Layer w31.5: C9.2@1634.65,1020.47 R7.1
NetC10_N: C10.N R9.1 | length 130.1
  Top Layer w15: C10.N C10.N@673.43,1180.91 ; R9.1@673.43,1051.38 R9.1
  Top Layer w31.5: R9.1@673.43,1051.38 C10.N@673.43,1180.91
NetC10_P: C10.P U3.12 | length 904.4
  Bottom Layer w31.5: C10.P 746.06,1332.68 1068.9,1332.68 1197.58,1203.99 1243.36,1203.99 1263.78,1224.41 1263.78,1300.3 1339.96,1376.48 U3.12
NetC11_1: C11.1 U2.7 | length 97.2
  Top Layer w15: C11.1 C11.1@1315.35,1383.86 ; U2.7@1315.35,1287.8 U2.7
  Top Layer w31.5: U2.7@1315.35,1287.8 C11.1@1315.35,1383.86
NetJ1_A5: J1.A5 R2.1 | length 126.3
  Top Layer w15.75: J1.A5 351.78,1692.91 371.47,1712.6 R2.1
NetJ1_B5: J1.B5 R4.1 | length 124.6
  Top Layer w15.75: J1.B5 353.75,1653.54 369.5,1637.8 R4.1
NetR3_1: R3.1 R5.2 U1.1 | length 176.2
  Top Layer w31.5: R3.1 R5.2 1189.27,1598.72 1189.27,1686.71 U1.1
NetR6_2: R6.2 U2.1 | length 232.6
  Top Layer w31.5: R6.2 1013.39,1044.09 1082.68,974.8 U2.1
NetR8_2: R8.2 R9.2 VR1.2 | length 429.1
  Top Layer w31.5: VR1.2 R8.2 R9.2
NetU2_3: U2.3 VR1.3 | length 1245.6
  Top Layer w39.37: VR1.3 1208.66,767.72 U2.3
NetU3_9: U3.9 Y1.2 | length 256.8
  Bottom Layer w31.5: Y1.2 1462.6,1312.99 1489.96,1340.35 U3.9
pads on no net: J1.S1 J1.S2 J1.S3 J1.S4 U3.1

## Polygon pours and split planes (outlines as drawn)
3V3 on Top Layer "3V3T" (solid, pour order 0): 814.96,1802.17 814.96,1577.76 845.47,1547.24 1116.14,1547.24 1149.61,1580.71 1149.61,1767.72 1115.16,1802.17
GND on Top Layer "GND" (solid, pour order 1): 0,2062.01 0,0 2154.53,0 2154.53,2062.01
GND on Bottom Layer "GND" (solid, pour order 3): 2055.12,2094.49 2019.68,2059.06 2019.68,0 0,0 0,2082.68
3V3 on Bottom Layer "3V3" (solid, pour order 2): 1374.02,1620.08 1405.51,1620.08 1405.51,1516.73 1393.7,1504.92 987.2,1504.92 937.01,1555.12 937.01,1761.81 968.86,1793.67 1033.1,1793.67 1066.93,1759.84 1066.93,1622.05 1110.24,1578.74 1332.68,1578.74 1358.27,1604.33

## Other copper
Bottom Layer:
  pour cut-out: 1411.78,1317.52 1401.5,1327.8 1401.5,1460.71 1385.74,1460.71 1350.39,1496.06 1125.98,1496.06 1125.98,1350.39 1122.05,1346.46

## Silkscreen, mask and mechanical layers (free items; w line width, h text height)
Top Overlay:
  text "Vol++" at 45.43,1234.41 h60
  text "Vol+" at 147.8,521.81 h60
  text "K+" at 1206.85,521.81 h60
  text "Vol-" at 600.55,517.87 h60
  text "K-" at 1651.73,517.87 h60